# Altium PCB Driver Board Simplified.PcbDoc
Units mm, origin at the board's own origin, x right, y up, seen from the top; angles counter-clockwise.
Board outline 61 x 44 mm, 2 copper layers (Top Layer, Bottom Layer); 33 components, 23 nets, 90 pads, 11 vias.
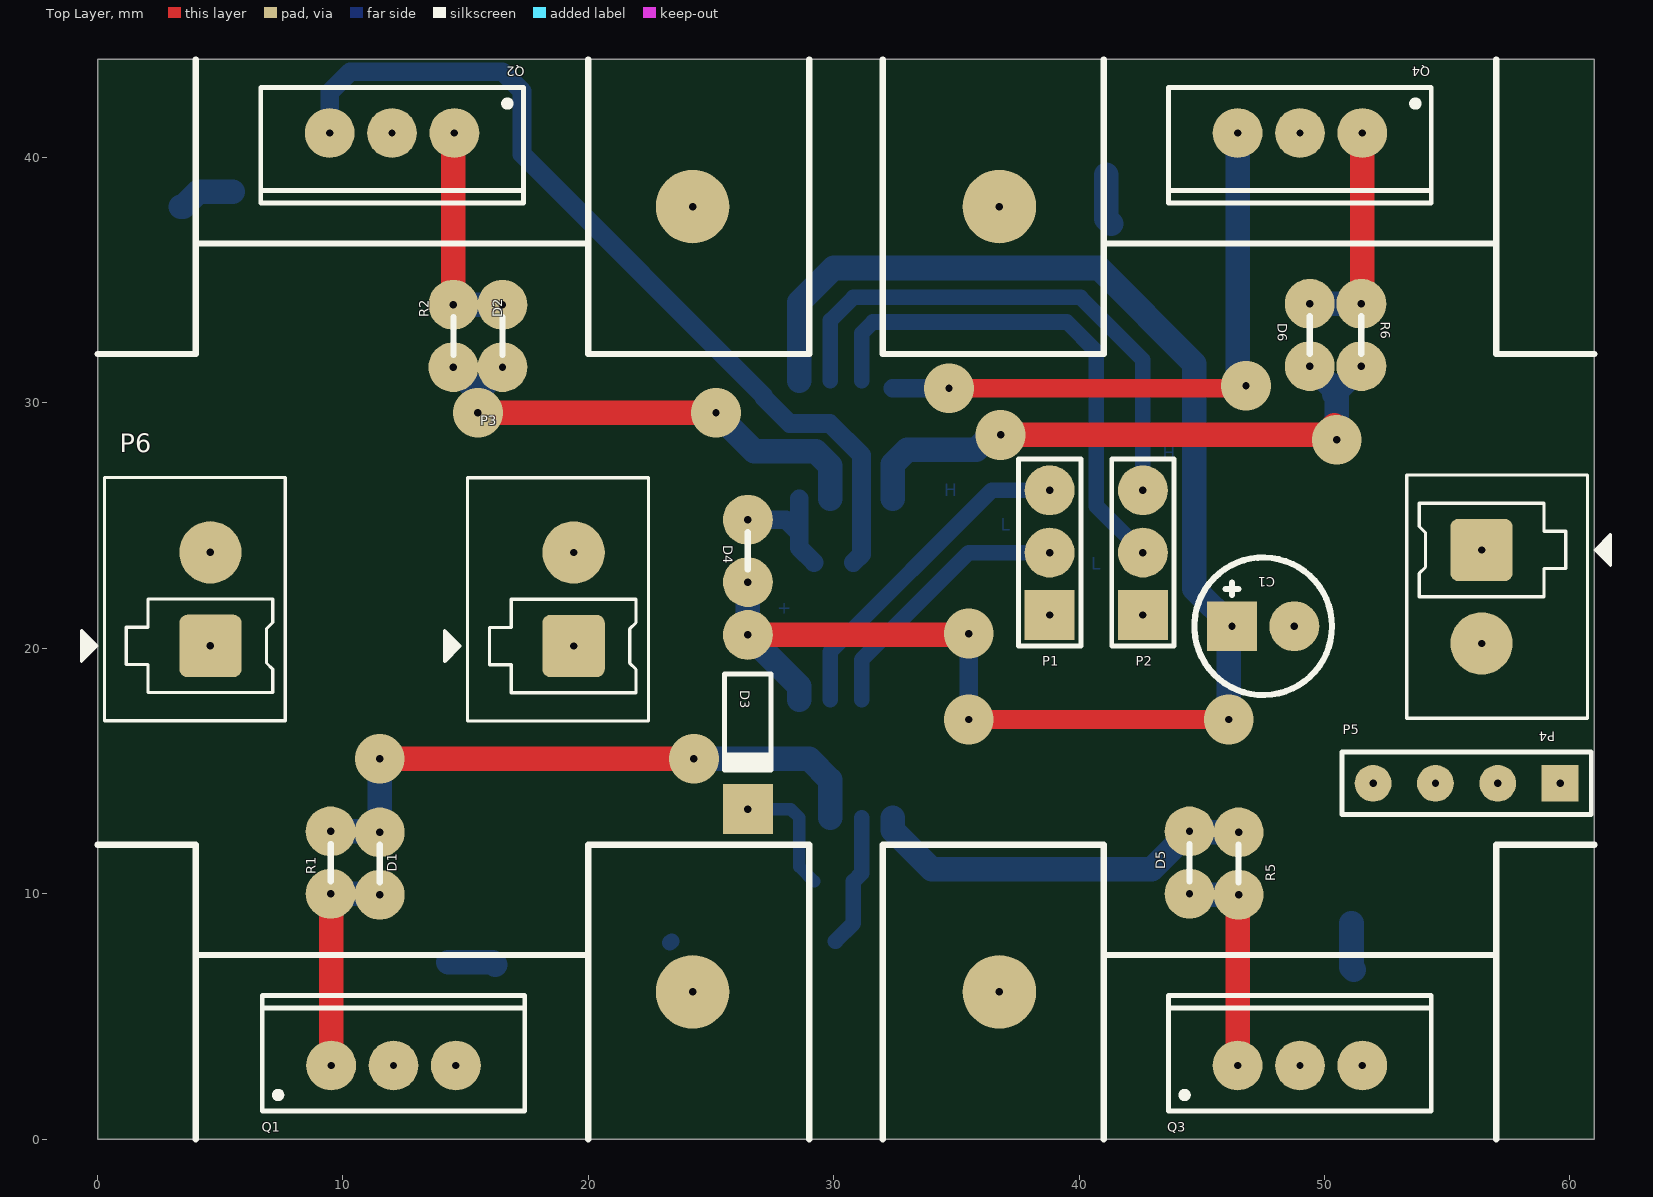
[diagram p0: Top Layer view]
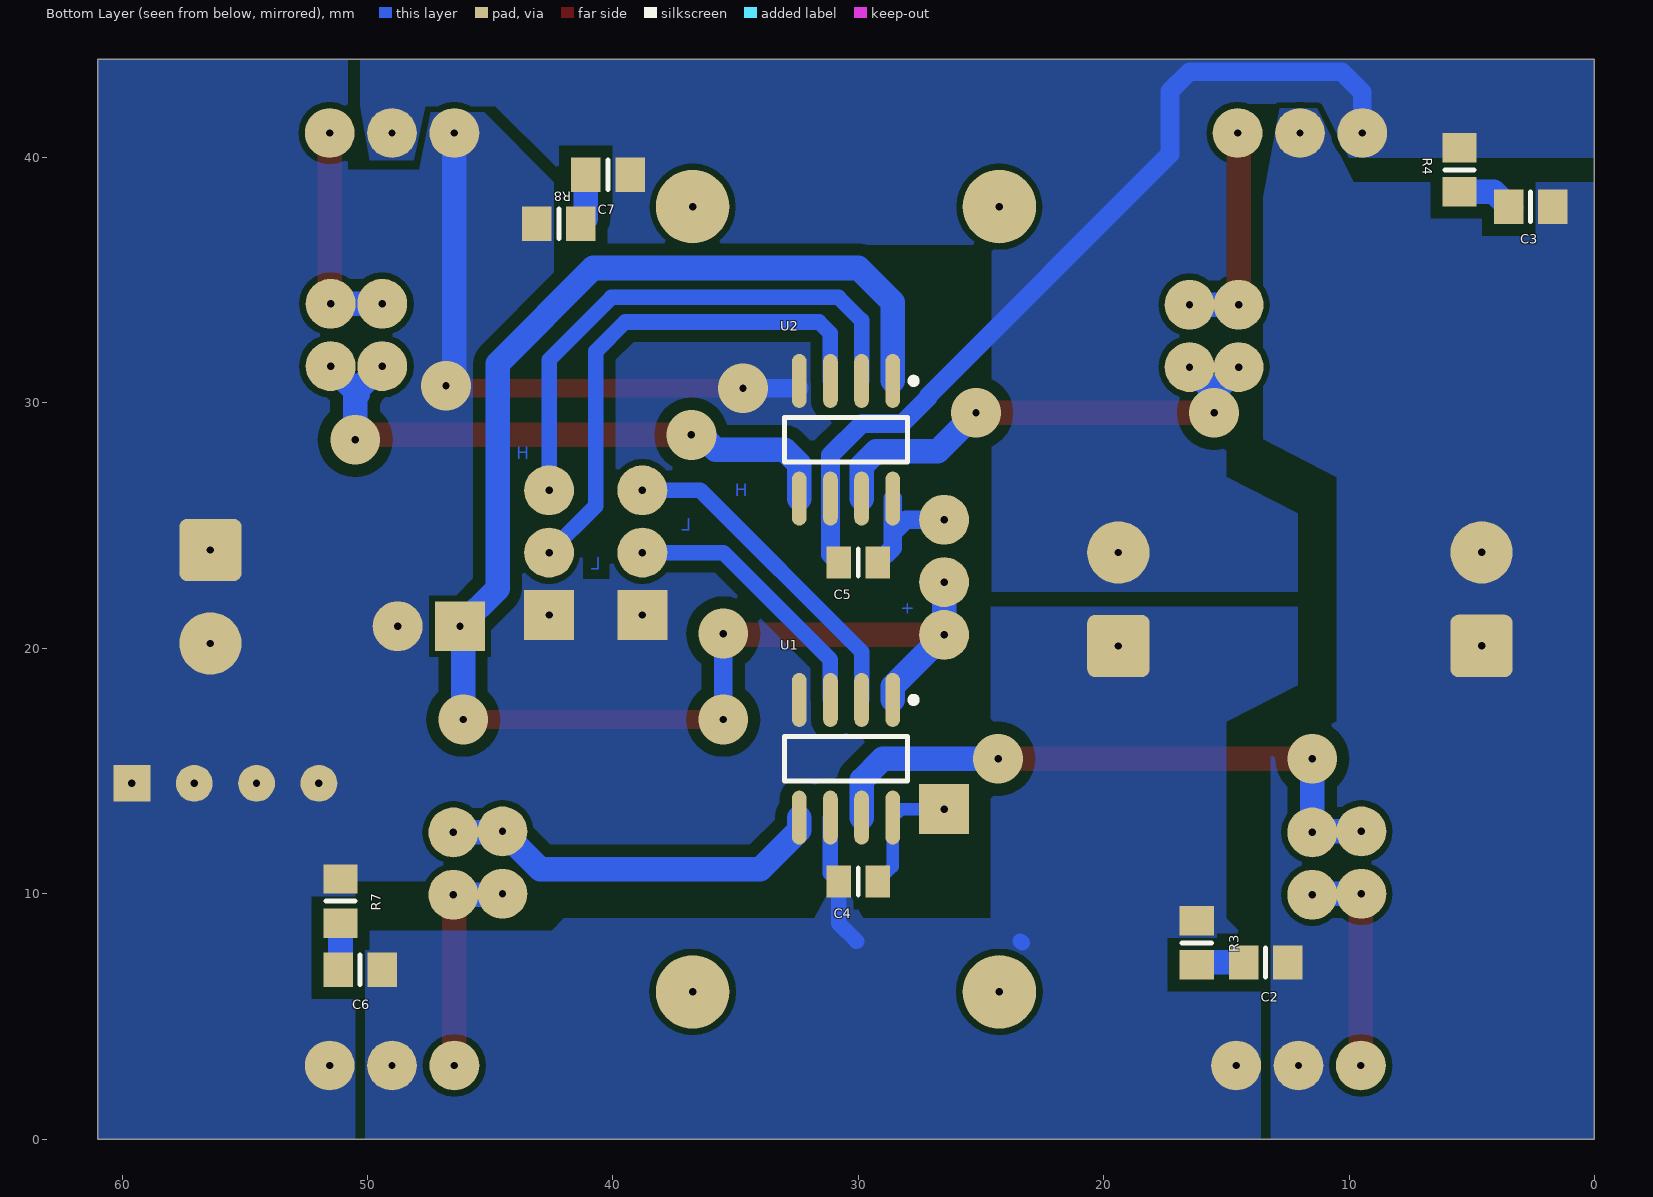
[diagram p1: Bottom Layer view, seen from below]

## Layer stack, top to bottom
Top Solder: solder mask 0.0102, Solder Resist, Dk 3.5
Top Layer: signal copper 0.0356
Dielectric 1: dielectric 0.32, FR-4, Dk 4.8
Bottom Layer: signal copper 0.0356
Bottom Solder: solder mask 0.0102, Solder Resist, Dk 3.5

## Board outline
0,0 0,44 61,44 61,0

## Design rules (kind name [scope] priority, off if disabled: settings)
Clearance [All] p1: gap=0.254 except(0.5: Arc-Poly Track-Poly SMDPad-Poly Via-Poly Fill-Poly)
HoleSize [IsVia] p1: absolutevalues=TRUE maxlimit=2.032 minlimit=0.3 maxpercent=80.000 minpercent=20.000
MinimumSolderMaskSliver [All] p1: minsoldermaskwidth=0
PolygonConnect [All] p1: connectstyle=Direct reliefconductorwidth=0.254 reliefentries=4 polygonreliefangle="90 Angle" airgapwidth=0.254
RoutingVias [All] p1: holewidth=0.711 width=1.27 viastyle="Through Hole" minholewidth=0.711 minwidth=1.27 maxholewidth=0.711 maxwidth=1.27
SilkToSilkClearance [All] p1: silktosilkclearance=0
SilkToSolderMaskClearance [IsPad] p1: minsilkscreentomaskgap=0 clearancetoexposedcopper=TRUE
SolderMaskExpansion [All] p1: expansion=0.102
Width "High Current" [InNetClass('High Current')] p1: maxlimit=2.54 minlimit=0.508 preferedwidth=2.032
Width Gate [InNetClass('Gate')] p2: maxlimit=2 minlimit=0.8 preferedwidth=1
Width Power [InNetClass('Power')] p3: maxlimit=2 minlimit=0.254 preferedwidth=1.5
Width [All] p4: maxlimit=2.54 minlimit=0.254 preferedwidth=0.508
26 further rules are at their usual default settings.

## Classes and differential pairs
net class Power: 12V GND LEFT_OUT RIGHT_OUT
net class "High Current": GND HV LEFT_OUT RIGHT_OUT
net class Gate: LEFT_HIGH_OUT LEFT_LOW_OUT NetD1_1 NetD2_1 NetD5_1 NetD6_1 RIGHT_HIGH_OUT RIGHT_LOW_OUT

## Components (designator, comment, footprint, x,y, rotation, side; value= is the part's Value field where it differs from the comment)
C1 "10uF" "100mil CAP - 80mil pad" 47.5,20.9 r180 top
C2 "Ceramic Cap" 6-0805_N 13.4,7.2 r0 bottom
C3 "Ceramic Cap" 6-0805_N 2.6,38 r0 bottom
C4 "Ceramic Cap" 6-0805_L 30,10.5 r180 bottom
C5 "Ceramic Cap" 6-0805_L 30,23.5 r180 bottom
C6 "Ceramic Cap" 6-0805_N 50.3,6.9 r0 bottom
C7 "Ceramic Cap" 6-0805_N 40.2,39.3 r0 bottom
D1 "Diode 1N4148" "Resistor 100MIL" 11.5,9.96 r90 top
D2 "Diode 1N4148" "Resistor 100MIL" 16.5,34 r270 top
D3 "FR104" DO-35 26.5,17 r270 top
D4 "FR104" "Resistor 100MIL" 26.5,22.7 r90 top
D5 "Diode 1N4148" "Resistor 100MIL" 44.5,10 r90 top
D6 "Diode 1N4148" "Resistor 100MIL" 49.4,34.04 r270 top
P1 "Header 3" HDR1X3 38.8,21.36 r90 top
P2 "Header 3" HDR1X3 42.6,21.36 r90 top
P3 "Header 2" 2P_PCB_TERM_BLOCK_HDR 19.4,22 r180 top
P4 "Header 2" 2P_PCB_TERM_BLOCK_HDR 56.4,22.105 r0 top
P5 "Header 4" HDR1X4 59.6,14.5 r180 top
P6 "Header 2" 2P_PCB_TERM_BLOCK_HDR 4.6,22.005 r180 top
Q1 "MOSFET-N" TO-220AB 12.06,3 r0 top locked
Q2 "MOSFET-N" TO-220AB 12,41 r180 top
Q3 "MOSFET-N" TO-220AB 49,3 r0 top locked
Q4 "MOSFET-N" TO-220AB 49,41 r180 top
R1 "4R7" "Resistor 100MIL" 9.5,12.54 r270 top
R2 "4R7" "Resistor 100MIL" 14.5,31.46 r90 top
R3 "10k" 6-0805_N 16.2,8 r90 bottom
R4 "10k" 6-0805_N 5.5,39.5 r90 bottom
R5 "4R7" "Resistor 100MIL" 46.5,12.5 r270 top
R6 "4R7" "Resistor 100MIL" 51.5,31.5 r90 top
R7 "10k" 6-0805_N 51.1,9.7 r90 bottom
R8 "10k" 6-0805_N 42.2,37.3 r0 bottom
U1 "IR2106" SO8_N 30.5,15.5 r270 bottom
U2 "IR2106" SO8_N 30.5,28.5 r270 bottom

## Footprints (in the part's own frame and the unit in brackets; to place one, negate y for a bottom-side part, rotate by r counter-clockwise, add the part's x,y. Pads: shape width x height; smd on the part's side, far side on the other; paste and mask are expansions set on the pad)
2P_PCB_TERM_BLOCK_HDR [mm] "TERM BLOCK HDR 2POS 3.81MM"
  rrect25% 2.54x2.54 hole 0.3: 1(0,1.905)
  round 2.54 hole 0.3: 2(0,-1.905)
  silkscreen extent -3.05,-4.96 5.26,4.96, body extent -3,-4.95 4.25,4.96, height 9.2
6-0805_L [mm] "Chip Resistor, Body 2.0x1.2mm, IPC High Density"
  rect 1x1.3 smd: 1(-0.8,0) 2(0.8,0)
  silkscreen extent 0,-0.55 0,0.55, body extent -1.07,-0.7 1.07,0.7, height 0.7
6-0805_N [mm] "Chip Resistor, Body 2.0x1.2mm, IPC Medium Density"
  rect 1.2x1.4 smd: 1(-0.9,0) 2(0.9,0)
  silkscreen extent 0,-0.6 0,0.6, body extent -1.07,-0.7 1.07,0.7, height 0.7
"100mil CAP - 80mil pad" [mil]
  rect 80x80 hole 11.81: 1(50,0)
  round 80 hole 11.81: 2(-50,0)
  silkscreen extent -110,-110 110,110
DO-35 [mm] "Diode, Axial; Body 3.8 x 1.9 mm (LxDia. max), Lead Dia. 0.53 mm (max)"
  round 2.032 hole 0.3: 1(-3.55,0)
  rect 2.032x2.032 hole 0.3: 2(3.55,0)
  silkscreen extent -1.95,-0.95 2.05,0.95
HDR1X3 [mil] "Connector; Header; 3 Position"
  rect 80x80 hole 11.81: 1(0,0)
  round 80 hole 11.81: 2(100,0) 3(200,0)
  silkscreen extent -50,-50 250,50
HDR1X4 [mm] "Connector; Header; 4 Position"
  rect 1.5x1.5 hole 0.3: 1(0,0)
  round 1.5 hole 0.3: 2(2.54,0) 3(5.08,0) 4(7.62,0)
  silkscreen extent -1.27,-1.27 8.89,1.27
"Resistor 100MIL" [mil]
  round 80 hole 11.81: 1(0,0) 2(100,0)
  silkscreen extent 20,0 80,0
SO8_N [mm] "SOIC, 8-Leads, Body 4.9x3.9mm, Pitch 1.27mm, IPC Medium Density"
  oval 2.2x0.6 smd: 1(-2.4,1.905) 2(-2.4,0.635) 3(-2.4,-0.635) 4(-2.4,-1.905) 5(2.4,-1.905) 6(2.4,-0.635) 7(2.4,0.635) 8(2.4,1.905)
  silkscreen extent -2.52,-2.5 0.9,2.88, body extent -2,-2.5 2,2.5, height 1.75
TO-220AB [mil] "TO, Thru-Hole, Vertical, Heatsink Mounted; 3 In-Line Leads; Pitch 2.54 mm"
  round 80 hole 11.81: 1(-100,0) 2(0,0) 3(100,0)
  silkscreen extent -211,-73 211,112, body extent -213,-75 213,114, height 760

## Part data
C1: library part "Electrolytic Cap"
D1 D2 D5 D6: "High Conductance Fast Diode"
D3 D4: library part "Diode 11DQ03", "Schottky Rectifier"
P1 P2: "Header, 3-Pin"
P3 P4 P6: "Header, 2-Pin"
P5: "Header, 4-Pin"
Q1 Q2 Q3 Q4: "N-Channel MOSFET"
R1 R2 R3 R4 R5 R6 R7 R8: library part Resistor

## Free pads (board coordinates)
  round 3 hole 0.3: 0(24.25,6) 0(24.25,38) 0(36.75,6) 0(36.75,38)

## Via types
v1: diameter 2.032, hole 0.3, Top Layer to Bottom Layer, 11 vias

## Nets (pads, with @x,y where several pads share a name; then routed paths per layer and width w, separated by ;. In a path a pad name is that pad's centre, name@x,y a point inside that pad or via, vN(x,y) a via of type N, cw(c..) or ccw(c..) an arc to the next point about the centre after c; other vN are vias at no path point)
12V: C1.1 D3.1 D4.1 U1.1 U2.1 | length 65.5
  Top Layer w0.762: v1@35.45,20.55 v1(35.5,20.6) ; v1(35.5,17.1) v1(46.1,17.1)
  Top Layer w1: D3.1 v1@35.45,20.55
  Bottom Layer w0.762: v1(35.5,17.1) v1(35.5,20.6) ; C1.1@46.1,20.77 C1.1
  Bottom Layer w1: D4.1 D3.1 28.595,18.455 U1.1 ; U2.1 28.595,34.095 30,35.5 40.8,35.5 44.7,31.6 44.7,22.43 C1.1 ; v1(46.1,17.1) C1.1@46.1,20.77
GND: C1.2 P1.1 P2.1 P4.1 P4.2 P5.1 P5.2 P5.3 P5.4 Q3.3 Q4.3 R7.2 R8.2 U1.4 U2.4 | length 25.2
  Top Layer w0.635: v1(34.7,30.6) 34.9,30.6 v1@35.2,30.3 ; v1@46,30.6 46.4,31 46.5,30.9 v1@46.5,30.7
  Top Layer w0.762: v1@34.9,30.6 v1@46,30.6
  Bottom Layer w0.635: v1@46.46,30.74 v1@46.5,30.7
  Bottom Layer w0.762: U2.4@32.405,30.6 v1(34.7,30.6)
  Bottom Layer w1: v1@46.46,30.74 Q4.3
  other v1: 46.8,30.7
HIN_LEFT: P1.3 U1.2 | length 13.6
  Bottom Layer w0.635: U1.2 29.865,19.865 36.44,26.44 P1.3
HIN_RIGHT: P2.3 U2.2 | length 22
  Bottom Layer w0.635: U2.2 29.865,33.365 30.8,34.3 40.057,34.3 42.6,31.757 P2.3
HV: C2.1 C3.1 P6.1 P6.2 Q1.2 Q2.2
LEFT_HIGH_OUT: D1.2 R1.1 U1.7 | length 25.4
  Top Layer w1: v1(11.5,15.5) 23.9,15.5 24.1,15.3 v1(24.3,15.5)
  Bottom Layer w1: R1.1 11.46,12.54 D1.2 v1(11.5,15.5) ; v1(24.3,15.5) 29,15.5 29.865,14.635 U1.7
LEFT_LOW_OUT: D5.2 R5.1 U1.5 | length 15.9
  Bottom Layer w1: U1.5 32.405,12.595 33.995,11.005 42.965,11.005 D5.2 44.54,12.5 R5.1 R5.1@46.495,12.505
LEFT_OUT: C4.1 C6.1 P3.1 Q1.3 Q3.2 R3.2 U1.6 | length 5.6
  Bottom Layer w0.635: 23.32,8 23.392,8.072 ; 30.072,8.072 30.8,8.8 C4.1 31.135,10.835 U1.6
LIN_LEFT: P1.2 U1.3 | length 11.1
  Bottom Layer w0.635: U1.3 31.135,19.535 35.5,23.9 P1.2
LIN_RIGHT: P2.2 U2.3 | length 21.2
  Bottom Layer w0.635: U2.3 31.135,32.835 31.6,33.3 39.5,33.3 40.7,32.1 40.7,25.8 P2.2
NetC2_2: C2.2 R3.1 | length 1.9
  Bottom Layer w1: C2.2 16.1,7.2 R3.1
NetC3_2: C3.2 R4.1 | length 2.3
  Bottom Layer w1: C3.2@3.4,38 C3.2 4.1,38.6 R4.1
NetC4_2: C4.2 D3.2 U1.8 | length 5.1
  Bottom Layer w0.508: D3.2 28.245,13.45 U1.8 28.595,11.105 C4.2
NetC5_2: C5.2 D4.2 U2.8 | length 5.2
  Bottom Layer w0.762: D4.2 28.055,25.24 28.595,24.7 ; U2.8 28.595,24.7 ; C5.2 28.595,24.105 28.595,24.7
NetC6_2: C6.2 R7.1 | length 1.9
  Bottom Layer w1: R7.1 51.1,7 C6.2
NetC7_2: C7.2 R8.1 | length 2.1
  Bottom Layer w1: C7.2 41.1,37.5 R8.1
NetD1_1: D1.1 Q1.1 R1.2 | length 9.1
  Top Layer w1: R1.2 9.52,9.98 Q1.1
  Bottom Layer w1: R1.2@9.52,9.98 R1.2 11.46,10 D1.1
NetD2_1: D2.1 Q2.1 R2.2 | length 9.1
  Top Layer w1: R2.2 14.5,40.96 Q2.1
  Bottom Layer w1: R2.2@14.54,34.04 R2.2 D2.1
NetD5_1: D5.1 Q3.1 R5.2 | length 9
  Top Layer w1: Q3.1 46.46,9.92 R5.2
  Bottom Layer w1: D5.1 44.54,9.96 R5.2 R5.2@46.46,9.92
NetD6_1: D6.1 Q4.1 R6.2 | length 9
  Top Layer w1: R6.2 51.54,34.08 Q4.1
  Bottom Layer w1: D6.1@49.5,34 49.54,34.04 R6.2 R6.2@51.54,34.08
RIGHT_HIGH_OUT: D2.2 R2.1 U2.7 | length 20.3
  Top Layer w1: v1(15.5,29.6) v1(25.2,29.6)
  Bottom Layer w1: R2.1 v1@15.5,30.46 ; v1(15.5,29.6) v1@15.5,30.46 ; D2.2 v1@15.5,30.46 ; v1(25.2,29.6) 26.77,28.03 29.27,28.03 29.865,27.435 U2.7
RIGHT_LOW_OUT: D6.2 R6.1 U2.5 | length 25.9
  Top Layer w1: v1(36.8,28.7) 50,28.7 50.4,29.1 50.5,29 v1(50.5,28.5)
  Bottom Layer w1: U2.5 32.405,27.505 33,28.1 35.8,28.1 36.4,28.7 v1(36.8,28.7) v1@36.8,29 ; D6.2@49.5,31.46 50.5,30.46 ; v1(50.5,28.5) 50.5,30.26 50.4,30.36 50.5,30.46 ; R6.1 50.5,30.5 50.5,30.46
RIGHT_OUT: C5.1 C7.1 P3.2 Q2.3 Q4.2 R4.2 U2.6 | length 36.2
  Bottom Layer w0.762: Q2.3 9.46,42.66 10.3,43.5 16.5,43.5 17.3,42.7 17.3,40.135 27.151,30.284 27.151,30.222 28.208,29.165 29.835,29.165 31.135,27.865 U2.6 31.135,23.835 C5.1

## Polygon pours and split planes (outlines as drawn)
LEFT_OUT on Bottom Layer "LEFT_OUT" (solid, remove dead copper, pour order 2): 13.6,0 13.6,7.6 15,9 15,17 12.1,18.5 12.1,21.7 16.1,21.7 18.8,21.7 24.6,21.7 24.6,9 29.8,9 30.3,9.9 30.8,9.9 31.3,9.9 31.8,9 32.1,9 42,9 42.5,8.5 50.1,8.5 50.1,0
HV on Bottom Layer "HV" (solid, remove dead copper, pour order 0): 13.2,0 0,0 0,39 0.5,39 9.815,39 11.3,42 12.83,42 13.5,38.38 13.5,28.519 10.5,26.963 10.5,17.03 13.2,15.63
RIGHT_OUT on Bottom Layer "RIGHT_OUT" (solid, remove dead copper, pour order 1): 49.913,39.9 48.12,39.9 47.651,42.1 44.8,42.1 41.9,39.2 41.9,36.445 39.145,36.445 24.555,36.445 24.555,22.3 16.1,22.3 12.1,22.3 12.1,25.5 15,27 15,42.2 11.633,42.2 11.2,42.2 10.1,40 9.4,40 0,40 0,44 50.3,44 50.3,42.1
GND on Bottom Layer "GND" (solid, remove dead copper, pour order 6): 50.5,0 61,0 61,44 50.8,44 50.8,39.5 47.9,39.5 47.4,41.9 45.3,41.9 42.4,39 42.4,35.1 29.4,35 29.4,27.5 37.49,27.5 37.49,25.09 29.4,17 29.4,10.5 50,10.5 50.5,10.5

## Other copper
Bottom Layer:
  text "H" at 43.4,27.7 h0.51
  text "H" at 34.5,26.2 h0.51
  text "L" at 36.8,24.8 h0.51
  text "L" at 40.5,23.2 h0.51
  text "+" at 27.7,21.4 h0.51

## Silkscreen, mask and mechanical layers (free items; w line width, h text height)
Top Overlay:
  lines w0.254: 0,12 4,12 4,0 ; 0,32 4,32 4,44 ; 4,7.5 20,7.5 ; 4,36.5 20,36.5 ; 20,0 20,12 29,12 29,0 ; 20,44 20,32 29,32 29,44 ; 32,0 32,12 41,12 41,0 ; 32,44 32,32 41,32 41,44 ; 41,7.5 57,7.5 ; 41,36.5 57,36.5 ; 57,0 57,12 61,12 ; 57,44 57,32 61,32